# EAGLE board ads (EAGLE 6.5.0)
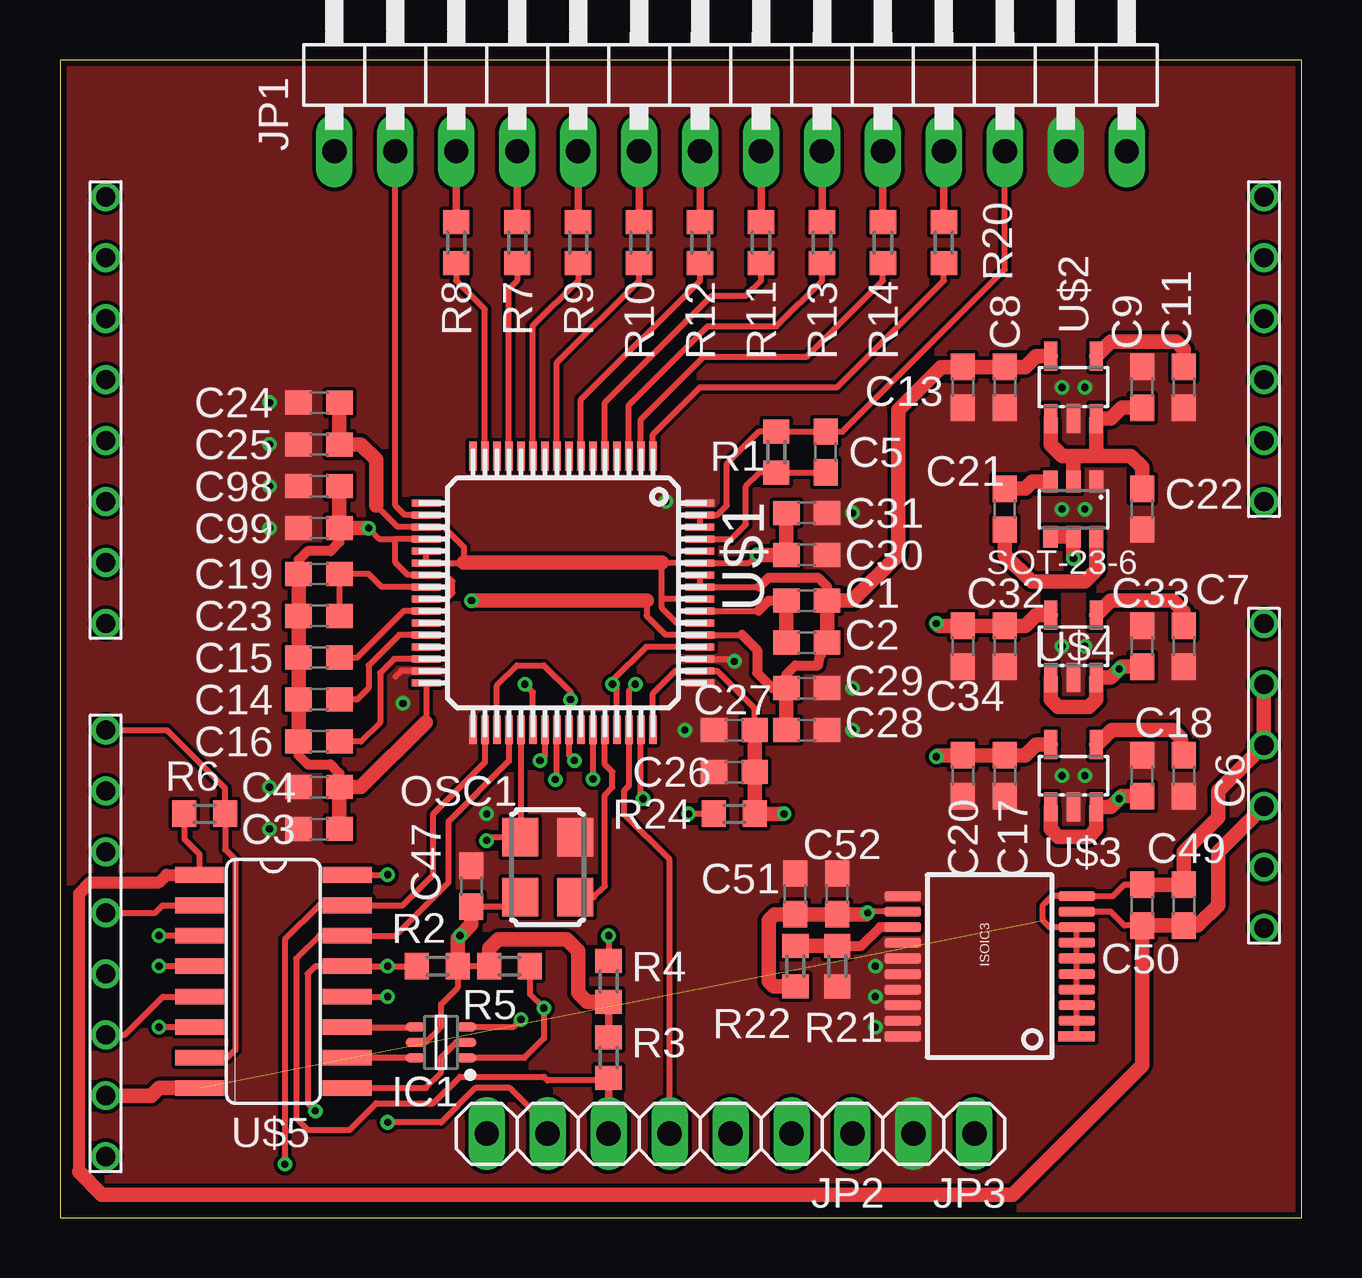
[diagram p0: board, top side]
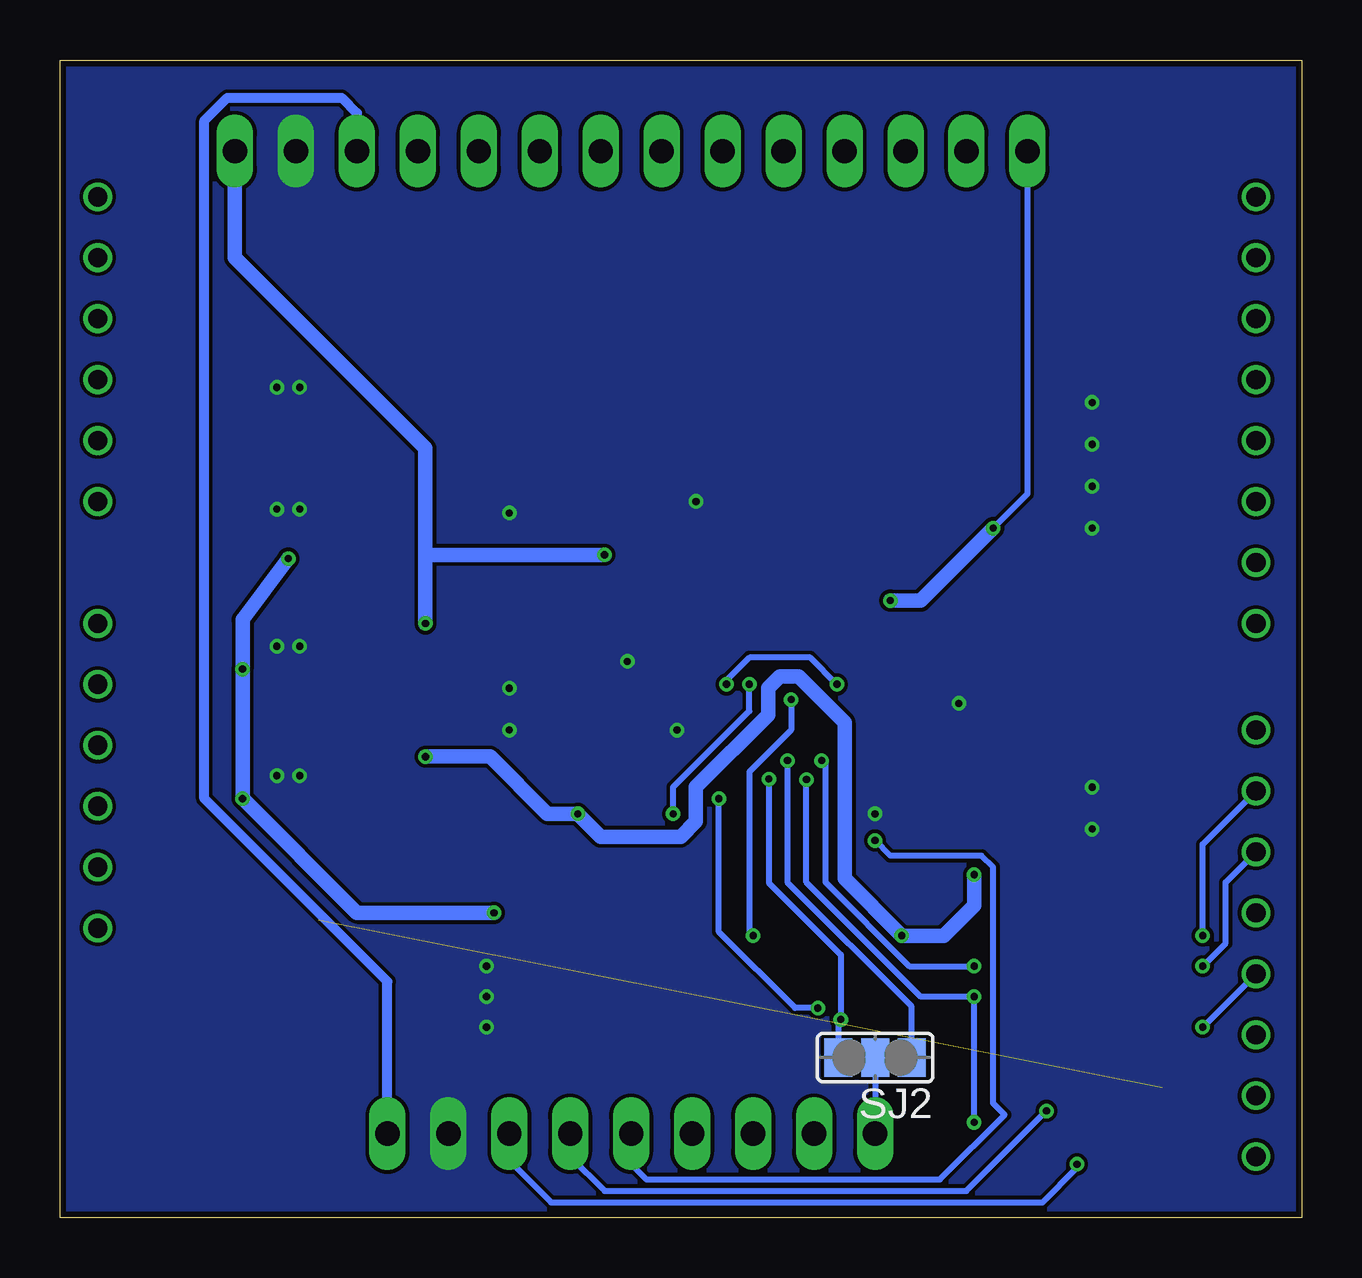
[diagram p1: board, bottom side, seen from below]

Size 51.74 x 48.25 mm. Coordinates in mm from the lower left corner, seen from the top.
Outline: 0,0 51.74,0 51.74,48.25 0,48.25 0,0
Copper layers (1*2*15*16): Top 0.035mm / dielectric 0.2mm / layer 2 0.0175mm / dielectric 1.1mm / layer 15 0.0175mm / dielectric 0.2mm / Bottom 0.035mm
Design rules "SeeedStudio_DRU_no_angle_20130527": minimum track width 6mil, minimum drill 12mil, track to track 6mil, track to pad 6mil, pad to pad 6mil, via to via 6mil, smd to smd 0mil, copper to edge 10mil, drill to drill 10mil, minimum pad ring 6mil, minimum via ring 6mil, stop-mask expansion 2mil, vias tented up to drill 25mil, thermal gap 10mil

## Footprints (pad centres in the part's own frame; a part is rotated, then mirrored left to right if it is on the bottom)
ARDUINO = drill 0.8: 3V3 25.4,-12.7; 5V 25.4,-10.16; A_0 25.4,2.54; A_1 25.4,5.08; A_2 25.4,7.62; A_3 25.4,10.16; A_4 25.4,12.7; A_5 25.4,15.24; AREF -22.86,-24.765; D_0 -22.86,15.24; D_1 -22.86,12.7; D_2 -22.86,10.16; D_3 -22.86,7.62; D_4 -22.86,5.08; D_5 -22.86,2.54; D_6 -22.86,0; D_7 -22.86,-2.54; D_8 -22.86,-6.985; D_9 -22.86,-9.525; D_10 -22.86,-12.065; D_11 -22.86,-14.605; D_12 -22.86,-17.145; D_13 -22.86,-19.685; GND0 -22.86,-22.225; GND1 25.4,-7.62; GND2 25.4,-5.08; RESET 25.4,-15.24; VIN 25.4,-2.54
C0603 = smd 1.1 x 1: 1 -0.85,0; 2 0.85,0
SOT65P210X110-6AN_SC88_SC70-6 = smd 0.85 x 0.4: 1 -1.05,0.65; 2 -1.05,0; 3 -1.05,-0.65; 4 1.05,-0.65; 5 1.05,0; 6 1.05,0.65
SSOP20 = smd 0.419 x 1.524: 1 -2.925,-3.625; 2 -2.275,-3.625; 3 -1.625,-3.625; 4 -0.975,-3.625; 5 -0.325,-3.625; 6 0.325,-3.625; 7 0.975,-3.625; 8 1.625,-3.625; 9 2.275,-3.625; 10 2.925,-3.625; 11 2.925,3.625; 12 2.275,3.625; 13 1.625,3.625; 14 0.975,3.625; 15 0.325,3.625; 16 -0.325,3.625; 17 -0.975,3.625; 18 -1.625,3.625; 19 -2.275,3.625; 20 -2.925,3.625
1X14/90 = drill 1.016 long: 1 -16.51,-3.81; 2 -13.97,-3.81; 3 -11.43,-3.81; 4 -8.89,-3.81; 5 -6.35,-3.81; 6 -3.81,-3.81; 7 -1.27,-3.81; 8 1.27,-3.81; 9 3.81,-3.81; 10 6.35,-3.81; 11 8.89,-3.81; 12 11.43,-3.81; 13 13.97,-3.81; 14 16.51,-3.81
1X07 = drill 1.016 long: 1 -7.62,0; 2 -5.08,0; 3 -2.54,0; 4 0,0; 5 2.54,0; 6 5.08,0; 7 7.62,0
1X02 = drill 1.016 long: 1 -1.27,0; 2 1.27,0
ASF = smd 1.6 x 1.5: 1 -1.25,-1.15; 2 1.25,-1.15; 3 1.25,1.15; 4 -1.25,1.15
R0603 = smd 1 x 1.1: 1 -0.85,0; 2 0.85,0
SJ_2 = smd 1.168 x 1.6: 1 -1.524,0; 2 0,0; 3 1.524,0
SOT23-6 = smd 0.6 x 0.9: 1 -0.95,-1.15; 2 0,-1.15; 3 0.95,-1.15; 4 0.95,1.15; 5 0,1.15; 6 -0.95,1.15
TQFP64-10X10 = smd 1.2 x 0.3: 1 -5.7,3.75; 2 -5.7,3.25; 3 -5.7,2.75; 4 -5.7,2.25; 5 -5.7,1.75; 6 -5.7,1.25; 7 -5.7,0.75; 8 -5.7,0.25; 9 -5.7,-0.25; 10 -5.7,-0.75; 11 -5.7,-1.25; 12 -5.7,-1.75; 13 -5.7,-2.25; 14 -5.7,-2.75; 15 -5.7,-3.25; 16 -5.7,-3.75; 33 5.7,-3.75; 34 5.7,-3.25; 35 5.7,-2.75; 36 5.7,-2.25; 37 5.7,-1.75; 38 5.7,-1.25; 39 5.7,-0.75; 40 5.7,-0.25; 41 5.7,0.25; 42 5.7,0.75; 43 5.7,1.25; 44 5.7,1.75; 45 5.7,2.25; 46 5.7,2.75; 47 5.7,3.25; 48 5.7,3.75 | smd 0.3 x 1.2: 17 -3.75,-5.7; 18 -3.25,-5.7; 19 -2.75,-5.7; 20 -2.25,-5.7; 21 -1.75,-5.7; 22 -1.25,-5.7; 23 -0.75,-5.7; 24 -0.25,-5.7; 25 0.25,-5.7; 26 0.75,-5.7; 27 1.25,-5.7; 28 1.75,-5.7; 29 2.25,-5.7; 30 2.75,-5.7; 31 3.25,-5.7; 32 3.75,-5.7; 49 3.75,5.7; 50 3.25,5.7; 51 2.75,5.7; 52 2.25,5.7; 53 1.75,5.7; 54 1.25,5.7; 55 0.75,5.7; 56 0.25,5.7; 57 -0.25,5.7; 58 -0.75,5.7; 59 -1.25,5.7; 60 -1.75,5.7; 61 -2.25,5.7; 62 -2.75,5.7; 63 -3.25,5.7; 64 -3.75,5.7
SOT23-5L = smd 0.55 x 1.2: 1 -0.95,-1.3; 2 0,-1.3; 3 0.95,-1.3; 4 0.95,1.3; 5 -0.95,1.3
SO16 = smd 0.66 x 2.032: 1 -4.445,-3.073; 2 -3.175,-3.073; 3 -1.905,-3.073; 4 -0.635,-3.073; 5 0.635,-3.073; 6 1.905,-3.073; 7 3.175,-3.073; 8 4.445,-3.073; 9 4.445,3.073; 10 3.175,3.073; 11 1.905,3.073; 12 0.635,3.073; 13 -0.635,3.073; 14 -1.905,3.073; 15 -3.175,3.073; 16 -4.445,3.073

## Placement (x,y rotation side)
ARDUINO1  ARDUINO  [ARDUINO]  24.77,27.3 0 top
C1  0,1 uF  [C0603]  31.11,25.72 180 top
C2  1 uF  [C0603]  31.11,23.97 180 top
C3  1 uF  [C0603]  10.79,16.19 180 top
C4  1 uF  [C0603]  10.79,17.94 180 top
C5  1.5 nF  [C0603]  31.91,31.91 90 top
C6  0.01 uF  [C0603]  46.83,18.41 270 top
C7  0.01 uF  [C0603]  46.83,23.81 270 top
C8  2.2 uF  [C0603]  39.37,34.61 270 top
C9  2.2 uF  [C0603]  45.09,34.61 90 top
C11  0.01 uF  [C0603]  46.83,34.61 270 top
C13  10 uF  [C0603]  37.62,34.61 270 top
C14  100 uF  [C0603]  10.79,21.59 0 top
C15  1 uF  [C0603]  10.79,23.34 0 top
C16  1 uF  [C0603]  10.79,19.84 0 top
C17  2.2 uF  [C0603]  39.37,18.41 270 top
C18  2.2 uF  [C0603]  45.09,18.41 90 top
C19  10 uF  [C0603]  10.79,26.83 180 top
C20  10 uF  [C0603]  37.62,18.41 270 top
C21  10 uF  [C0603]  39.37,29.53 90 top
C22  10 uF  [C0603]  45.09,29.53 270 top
C23  0.1 uF  [C0603]  10.79,25.08 180 top
C24  1 uF  [C0603]  10.79,33.97 180 top
C25  0.1 uF  [C0603]  10.79,32.23 180 top
C26  1 uF  [C0603]  28.1,18.57 180 top
C27  0.1 uF  [C0603]  28.1,20.32 180 top
C28  1 uF  [C0603]  31.11,20.32 180 top
C29  0.1 uF  [C0603]  31.11,22.07 180 top
C30  1 uF  [C0603]  31.11,27.62 0 top
C31  0.1 uF  [C0603]  31.11,29.37 0 top
C32  2.2 uF  [C0603]  39.37,23.81 270 top
C33  2.2 uF  [C0603]  45.09,23.81 90 top
C34  10 uF  [C0603]  37.62,23.81 270 top
C47  10 pF  [C0603]  17.14,13.81 270 top
C49  10 uF  [C0603]  46.83,13.02 90 top
C50  0.1 uF  [C0603]  45.09,13.02 90 top
C51  10 uF  [C0603]  30.64,13.49 90 top
C52  0.1 uF  [C0603]  32.38,13.49 90 top
C98  1 uF  [C0603]  10.79,30.48 0 top
C99  0.1 uF  [C0603]  10.79,28.73 0 top
IC1  NC7WZ17P6X  [SOT65P210X110-6AN_SC88_SC70-6]  15.88,7.3 180 top
ISOIC3  ADUM6010  [SSOP20]  38.73,10.48 90 top
JP1  [1X14/90]  27.94,48.26 0 top
JP2  [1X07]  25.4,3.49 180 top
JP3  [1X02]  36.83,3.49 180 top
OSC1  ASFL1  [ASF]  20.32,14.61 90 top
R1  1 M  [R0603]  29.84,31.91 270 top
R2  10 k  [R0603]  15.72,10.48 0 top
R3  10 k  [R0603]  22.86,6.67 270 top
R4  10 k  [R0603]  22.86,9.84 90 top
R5  10 k  [R0603]  18.73,10.48 180 top
R6  10 k  [R0603]  6.03,16.83 180 top
R7  5 k  [R0603]  19.05,40.64 90 top
R8  5 k  [R0603]  16.51,40.64 90 top
R9  5 k  [R0603]  21.59,40.64 90 top
R10  5 k  [R0603]  24.13,40.64 90 top
R11  5 k  [R0603]  29.21,40.64 90 top
R12  5 k  [R0603]  26.67,40.64 90 top
R13  5 k  [R0603]  31.75,40.64 90 top
R14  5 k  [R0603]  34.29,40.64 90 top
R20  5 k  [R0603]  36.83,40.64 90 top
R21  10 k  [R0603]  32.38,10.48 90 top
R22  17 k  [R0603]  30.64,10.48 270 top
R24  10 k  [R0603]  28.1,16.83 0 top
SJ2  [SJ_2]  17.78,6.67 180 bottom
SOT-23-6  LM2664  [SOT23-6]  42.23,29.53 180 top
U$1  ADS1298-TQFP64  [TQFP64-10X10]  20.95,26.04 270 top
U$2  TPS73025  [SOT23-5L]  42.23,34.61 0 top
U$3  TPS73025  [SOT23-5L]  42.23,18.41 0 top
U$4  TPS73025  [SOT23-5L]  42.23,23.81 0 top
U$5  SI8462IS1  [SO16]  8.89,9.84 270 top

## Library data of the parts
ARDUINO1 = dp_devices
C1-C9 C11 C13-C34 C47 C49-C52 C98 C99 R1-R14 R20-R22 R24 = rcl
IC1 = fairchild-tinylogic
ISOIC3 = SparkysWidgets
JP1-JP3 = pinhead
OSC1 = crystal; MF: Abracon Corporation; MPN: ASFL1-125.000MHZ-EC-T; OC_FARNELL: 1838931; OC_NEWARK: 19M1882
SJ2 = jumper
SOT-23-6 = lm2664
U$1 = ads1298
U$2-U$4 = texas-instruments
U$5 = silicon-labs

## Nets
1N: JP1.3 R8.2
2N: JP1.4 R7.2
3N: JP1.5 R9.2
4N: JP1.6 R10.2
5N: JP1.7 R12.2
6N: JP1.8 R11.2
7N: JP1.9 R13.2
8N: JP1.11 R20.2
8P: JP1.10 R14.2
-RAW: C9.1 C22.1 SOT-23-6.2 U$2.1 U$2.3
_CS: ARDUINO1.D_10 U$5.4
_DRDY: ARDUINO1.D_8 R6.1 U$5.7
_GND: ARDUINO1.GND0 ARDUINO1.GND1 ARDUINO1.GND2 C49.2 C50.2 ISOIC3.1 ISOIC3.2 ISOIC3.3 ISOIC3.4 ISOIC3.5 ISOIC3.6 ISOIC3.7 ISOIC3.8 ISOIC3.10 U$5.8
_MISO: ARDUINO1.D_12 U$5.6
_MOSI: ARDUINO1.D_11 U$5.2
_RESET: ARDUINO1.D_9 U$5.3
_SCLK: ARDUINO1.D_13 U$5.5
_VDD: ARDUINO1.5V C49.1 C50.1 ISOIC3.9 R6.2 U$5.1
AGND: C3.2 C4.2 C6.2 C7.2 C8.2 C9.2 C11.2 C13.2 C17.2 C18.2 C20.2 C22.2 C24.2 C25.2 C26.2 C27.2 C28.1 C29.1 C30.2 C31.2 C32.2 C33.2 C34.2 C47.1 C51.2 C52.2 C98.1 C99.1 ISOIC3.11 ISOIC3.14 ISOIC3.15 ISOIC3.16 ISOIC3.17 ISOIC3.18 ISOIC3.19 ISOIC3.20 JP1.13 JP3.2 OSC1.2 R21.1 SOT-23-6.1 U$1.31 U$1.33 U$1.49 U$1.51 U$1.64 U$2.2 U$3.2 U$4.2
AVDD: C24.1 C25.1 C30.1 C31.1 C32.1 C34.1 JP1.14 U$1.19 U$1.21 U$1.22 U$1.54 U$1.56 U$1.59 U$4.5
AVSS: C1.1 C2.1 C3.1 C4.1 C8.1 C13.1 C14.1 C15.1 C16.1 C19.2 C23.2 C28.2 C29.2 C98.2 C99.2 JP1.1 U$1.20 U$1.23 U$1.25 U$1.32 U$1.53 U$1.57 U$1.58 U$2.5
BIAS_ELEC: C5.2 JP1.12 JP3.1 R1.1 U$1.62 U$1.63
CLK: JP2.3 OSC1.3 U$1.37
CS: JP2.2 R2.1 U$1.39 U$5.13
D_IN: JP2.1 U$1.34 U$5.15
D_OUT: IC1.3 SJ2.3 U$1.43
DAISY_IN: SJ2.1 U$1.41
DRDY: IC1.1 R5.1 U$1.47
DVDD: C17.1 C20.1 C26.1 C27.1 C47.2 IC1.5 OSC1.4 R2.2 R3.1 R4.1 R5.2 R24.2 U$1.48 U$1.50 U$3.5 U$5.16
GND2: IC1.2 U$5.9
GPIO_2: OSC1.1 U$1.44
GPIO_3: R24.1 U$1.45 U$1.52
IN1P: R8.1 U$1.15
IN2P: R7.1 U$1.13
IN3P: R9.1 U$1.11
IN4P: R10.1 U$1.9
IN5P: R12.1 U$1.7
N$1: JP2.7 SJ2.2
N$2: C11.1 U$2.4
N$3: C21.1 SOT-23-6.6
N$4: C14.2 U$1.28
N$5: C16.2 U$1.30
N$6: C1.2 C2.2 U$1.55
N$7: C21.2 SOT-23-6.3
N$8: IC1.4 U$5.11
N$9: C19.1 C23.1 U$1.24
N$10: IC1.6 U$5.10
N$11: C5.1 R1.2 U$1.61
N$12: C15.2 U$1.26
N$13: C6.1 U$3.4
N$14: ISOIC3.13 R21.2 R22.1
N$15: C7.1 U$4.4
N$16: R11.1 U$1.5
N$17: R13.1 U$1.3
N$19: R20.1 U$1.1
N$20: R14.1 U$1.2
PWDN: R4.2 U$1.35
RAW: C18.1 C33.1 C51.1 C52.1 ISOIC3.12 R22.2 SOT-23-6.4 SOT-23-6.5 U$3.1 U$3.3 U$4.1 U$4.3
RESET: JP2.5 R3.2 U$1.36 U$5.14
SCLK: JP2.6 U$1.40 U$5.12
SRB2: JP1.2 U$1.18
START: JP2.4 U$1.38 U$1.46
VIN: ARDUINO1.VIN

## Tracks (layer width: path | path; a pad name or v marks a point on that pad's centre or on a via)
1N
  Top 0.305: JP1.3 R8.2
2N
  Top 0.305: R7.2 JP1.4
3N
  Top 0.305: R9.2 JP1.5
4N
  Top 0.305: R10.2 JP1.6
5N
  Top 0.305: R12.2 JP1.7
6N
  Top 0.305: R11.2 JP1.8
7N
  Top 0.305: R13.2 JP1.9
8N
  Top 0.305: R20.2 JP1.11
8P
  Top 0.305: R14.2 JP1.10
-RAW
  Top 0.61: 43.18,31.75 44.61,31.75 45.09,31.27 C22.1 | 43.18,31.75 U$2.3 43.78,33.31 44.23,33.76 C9.1 | U$2.1 41.28,32.22 41.75,31.75 42.23,31.75 | 42.23,31.75 43.18,31.75 | SOT-23-6.2 42.23,31.75
_CS  (via drill 0.3)
  Top 0.254: U$5.4 v4.13,10.48
  Bottom 0.254: v4.13,10.48 3.17,11.43 3.17,13.97 ARDUINO1.D_10
_DRDY
  Top 0.254: U$5.7 6.99,6.67 7.3,6.99 7.3,14.92 6.88,15.34 R6.1 6.88,17.88 4.45,20.32 ARDUINO1.D_8
_GND  (1 unrouted)
  Top 0.254: C50.2 44.35,13.87 43.88,13.4 ISOIC3.10 41.34,13.4 40.96,13.02 40.96,12.38 41.24,12.1 ISOIC3.8 ISOIC3.7 ISOIC3.6 ISOIC3.5 ISOIC3.4 ISOIC3.3 ISOIC3.2 ISOIC3.1
  Top 0.61: C50.2 C49.2 46.83,15.24 48.26,16.67 48.26,17.78 ARDUINO1.GND1 ARDUINO1.GND2 | U$5.8 4.13,5.4 3.81,5.08 ARDUINO1.GND0
_MISO  (via drill 0.3)
  Top 0.254: U$5.6 v4.13,7.94
  Bottom 0.254: ARDUINO1.D_12 v4.13,7.94
_MOSI
  Top 0.254: ARDUINO1.D_11 3.97,12.7 4.29,13.02 U$5.2
_RESET  (via drill 0.3)
  Top 0.254: U$5.3 v4.13,11.75
  Bottom 0.254: v4.13,11.75 4.13,15.56 ARDUINO1.D_9
_SCLK
  Top 0.254: ARDUINO1.D_13 2.7,7.62 4.29,9.21 U$5.5
_VDD
  Top 0.254: U$5.1 5.82,15.14 5.18,15.77 R6.2 | ISOIC3.9 43.76,12.75 44.35,12.17 C50.1
  Top 0.508: 0.79,1.91 0.79,13.49 1.27,13.97 4.13,13.97 4.45,14.29 U$5.1
  Top 0.61: ARDUINO1.5V 48.26,15.24 48.26,13.02 47.41,12.17 C49.1 C50.1 45.09,6.35 39.69,0.95 1.75,0.95 0.79,1.91
AGND  (via drill 0.3)
  Top 0.254: 15.08,22.79 U$1.31 14.21,22.79 13.97,22.54 | U$1.51 27.99,23.29 v28.1,23.18
  other vias: 33.02,22.07 33.02,20.32 42.7,23.81 41.75,23.81 41.75,29.53 42.7,29.53 42.7,34.61 41.75,34.61 42.7,18.41 41.75,18.41 14.29,21.43 8.73,17.94 8.73,16.19 8.73,28.73 8.73,30.48 8.73,32.23 8.73,33.97 25.24,29.84 26.04,20.32 17.78,16.83 33.02,29.37 33.97,10.48 33.97,9.21 33.97,7.94
  pour Top (no thermals): 0,0 52.07,0 52.07,48.26 0,48.26
  pour Bottom (no thermals): 0,0 51.75,0 51.75,48.26 0,48.26
AVDD  (via drill 0.3)
  Top 0.254: U$1.21 U$1.22 16.81,27.29 16.83,27.3 16.83,27.94 15.98,28.79 U$1.19 14.08,28.79 13.18,29.69 | U$1.54 25.7,24.79 25.08,25.4 25.08,25.72 | 25.08,25.72 25.08,27.3 25.1,27.29 U$1.59 28.71,27.29 v29.05,27.62 | U$1.56 25.15,25.79 25.08,25.72
  Top 0.61: 25.08,27.3 16.83,27.3 | C24.1 C25.1 12.54,32.23 13.18,31.59 13.18,29.69 | C31.1 C30.1 v29.05,27.62 | U$4.5 40.67,25.11 40.22,24.66 C32.1 C34.1 36.62,24.66 v36.51,24.77
  Bottom 0.61: JP1.14 44.45,40.01 36.51,32.07 36.51,27.62 | 36.51,27.62 v36.51,24.77 | v29.05,27.62 36.51,27.62
AVSS  (via drill 0.3)
  Top 0.254: U$1.20 13.97,28.29 | 24.45,25.72 24.45,25.08 25.25,24.29 U$1.53 28.42,24.29 | 13.97,28.29 13.97,27.3 14.49,26.79 U$1.23 16.08,26.79 16.35,26.51 16.35,26.04 16.1,25.79 U$1.25 | U$1.58 U$1.57 29.14,26.29 | U$1.32 15.26,20.65 15.24,20.64 | v12.86,28.73 13.31,28.29 13.97,28.29
  Top 0.406: C99.2 11.64,28.16 11.27,27.78 10.32,27.78 9.95,27.41 C19.2 | 28.42,24.29 29.05,23.65 29.05,22.7 29.69,22.07 C29.2 30.27,22.64 30.64,23.02 31.59,23.02 31.65,23.39 C2.1 | 29.14,26.29 29.53,26.67 31.59,26.67 31.96,26.3 C1.1 | C16.1 9.95,19.27 10.32,18.89 11.27,18.89 11.64,18.52 C4.1
  Top 0.61: v12.86,28.73 C99.2 C98.2 | C16.1 C14.1 C15.1 C23.2 C19.2 | 24.45,25.72 v17.14,25.72 | C29.2 C28.2 | C2.1 C1.1 33.02,25.72 34.92,27.62 34.92,33.66 36.73,35.46 C13.1 C8.1 40.22,35.46 40.67,35.91 U$2.5 | C3.1 C4.1 12.54,17.94 15.24,20.64
  Bottom 0.254: JP1.1 11.43,30.16 v12.86,28.73
  Bottom 0.61: v17.14,25.72 15.88,25.72 v12.86,28.73
BIAS_ELEC
  Top 0.254: U$1.62 U$1.63 27.38,29.29 27.78,29.69 27.78,31.43 29.11,32.76 R1.1 C5.2 32.6,32.76 39.37,39.53 JP1.12
  Bottom 0.406: JP3.1 38.1,9.84 45.72,17.46 45.72,45.72 44.77,46.67 40.01,46.67 39.37,46.04 JP1.12
CLK  (via drill 0.3)
  Top 0.254: U$1.37 19.2,15.89 OSC1.3 17.92,15.86 v17.78,15.72
  Bottom 0.254: JP2.3 27.94,2.22 27.3,1.59 15.08,1.59 12.38,4.29 12.86,4.76 12.86,14.61 13.34,15.08 17.14,15.08 v17.78,15.72
CS  (via drill 0.3)
  Top 0.254: R2.1 v13.65,10.48 U$5.13 10.64,10.48 10.32,10.16 10.32,4.76 v10.64,4.45 | U$1.39 20.2,19.25 v20,19.05
  Bottom 0.254: v13.65,10.48 16.35,10.48 19.84,13.97 19.84,18.89 v20,19.05 | JP2.2 30.48,2.54 29.05,1.11 13.97,1.11 v10.64,4.45
D_IN  (via drill 0.3)
  Top 0.254: U$1.34 17.7,18.98 15.56,16.83 15.56,14.29 14.29,13.02 U$5.15 10.79,13.02 9.37,11.59 v9.37,2.22
  Bottom 0.254: JP2.1 33.02,2.38 31.27,0.64 10.79,0.64 9.37,2.06 v9.37,2.22
D_OUT  (via drill 0.3)
  Top 0.254: U$1.43 v22.2,18.28 22.23,18.26 | IC1.3 18.91,7.95 v19.21,8.26
  Bottom 0.254: v22.2,18.28 22.2,13.95 19.21,10.95 v19.21,8.26 19.3,8.16 SJ2.3
DAISY_IN  (via drill 0.3)
  Top 0.254: U$1.41 21.2,19.28 v21.43,19.05
  Bottom 0.254: v21.43,19.05 21.43,13.97 16.26,8.79 SJ2.1
DRDY  (via drill 0.3)
  Top 0.254: R5.1 19.58,9.31 v20.16,8.73 20.16,7.46 19.35,6.65 IC1.1 | v24.29,17.46 24.2,17.54 U$1.47
  Bottom 0.254: v20.16,8.73 21.11,8.73 24.29,11.91 v24.29,17.46
DVDD  (via drill 0.3)
  Top 0.254: U$1.48 24.7,21.85 25.64,22.79 U$1.50 27.38,22.79 28.95,21.22 C27.1 | C47.2 18.78,12.96 OSC1.4 | IC1.5 15.24,7.3 15.88,7.94 15.88,8.89 16.57,9.58 R2.2 R5.2 | U$5.16 v13.65,14.29
  Top 0.305: R3.1 R4.1
  Top 0.61: U$3.5 40.67,19.71 40.22,19.27 C17.1 C20.1 36.57,19.27 v36.51,19.21 | R2.2 16.57,11.64 v16.67,11.75 17.14,12.22 C47.2 | v30.16,16.83 R24.2 C26.1 C27.1 | R4.1 21.96,8.99 21.59,9.37 21.59,11.11 21.11,11.59 18.26,11.59 17.88,11.21 R5.2
  Bottom 0.61: v36.51,19.21 33.81,19.21 31.43,16.83 v30.16,16.83 29.21,15.88 25.88,15.88 25.24,16.51 25.24,17.94 22.23,20.95 22.23,22.07 21.75,22.54 20.95,22.54 19.05,20.64 19.05,14.13 v16.67,11.75 14.92,11.75 13.65,13.02 v13.65,14.29
GND2
  Top 0.254: U$5.9 15.24,5.4 15.88,6.03 15.88,6.67 16.51,7.3 IC1.2
GPIO_2
  Top 0.254: OSC1.1 22.25,13.36 22.7,13.81 22.7,17.62 23.02,17.94 23.02,18.57 22.7,18.89 U$1.44
GPIO_3  (via drill 0.3)
  Top 0.254: U$1.52 24.42,23.79 23.02,22.38 v23.02,22.23 23.2,22.04 U$1.45 | R24.1 v26.19,16.83
  Bottom 0.254: v23.02,22.23 23.02,21.11 26.19,17.94 v26.19,16.83
IN1P
  Top 0.254: R8.1 16.51,39.05 17.7,37.86 U$1.15
IN2P
  Top 0.254: R7.1 19.05,39.05 18.7,38.71 U$1.13
IN3P
  Top 0.254: R9.1 21.59,39.05 19.68,37.15 19.68,31.75 U$1.11
IN4P
  Top 0.254: U$1.9 20.7,35.63 24.13,39.05 R10.1
IN5P
  Top 0.254: U$1.7 21.7,34.09 26.67,39.05 R12.1
  Top 0.305: 26.47,39.59 R12.1
N$1
  Bottom 0.254: SJ2.2 JP2.7
N$2
  Top 0.61: C11.1 46.83,36.2 46.51,36.51 43.78,36.51 U$2.4
N$3
  Top 0.61: C21.1 39.37,27.62 40.48,26.51 42.7,26.51 43.18,26.99 SOT-23-6.6
N$4
  Top 0.254: U$1.28 14.12,24.29 12.86,23.02 12.86,22.07 12.38,21.59 C14.2
N$5
  Top 0.254: U$1.30 13.92,23.29 13.34,22.7 13.34,20.64 12.54,19.84 C16.2
N$6
  Top 0.254: U$1.55 29.09,25.29
  Top 0.406: 29.09,25.29 29.53,25.72 C1.2
  Top 0.61: C1.2 C2.2
N$7
  Top 0.61: C21.2 40.22,30.38 40.52,30.68 SOT-23-6.3
N$8
  Top 0.254: U$5.11 14.81,7.94 IC1.4
N$9
  Top 0.254: U$1.24 13.4,26.29 12.86,26.83 C19.1 C23.1
N$10
  Top 0.254: U$5.10 14.81,6.67 IC1.6
N$11
  Top 0.254: U$1.61 27.97,28.29 28.57,28.89 28.57,30.48 29.15,31.06 R1.2 C5.1
N$12
  Top 0.254: C15.2 12.38,23.34 14.33,25.29 U$1.26
N$13
  Top 0.61: U$3.4 43.21,19.71 43.81,20.32 46.35,20.32 46.67,20 C6.1
N$14
  Top 0.406: ISOIC3.13 34.17,12.1 33.39,11.33 R21.2
  Top 0.61: R22.1 R21.2
N$15
  Top 0.61: U$4.4 43.78,25.72 46.35,25.72 46.83,25.24 C7.1
N$16
  Top 0.254: U$1.5 22.7,33.98 27.15,38.42 28.57,38.42 29.21,39.05 R11.1
N$17
  Top 0.254: U$1.3 23.7,33.87 26.99,37.15 29.84,37.15 31.75,39.05 R13.1
N$19
  Top 0.254: R20.1 36.83,39.05 32.38,34.61 26.67,34.61 24.7,32.64 U$1.1
N$20
  Top 0.254: U$1.2 24.2,33.25 26.83,35.88 31.11,35.88 34.29,39.05 R14.1
PWDN  (via drill 0.3)
  Top 0.254: U$1.35 18.2,22.17 19.05,23.02 20.16,23.02 21.27,21.91 v21.27,21.59 | v22.86,11.75 R4.2
  Bottom 0.254: v21.27,21.59 21.27,20.32 23.02,18.57 23.02,11.91 v22.86,11.75
RAW  (via drill 0.3)
  Top 0.254: ISOIC3.12 33.71,12.75 v33.66,12.7
  Top 0.61: C18.1 44.23,17.57 v44.13,17.46 43.78,17.11 U$3.3 43.18,16.19 42.86,15.88 41.59,15.88 41.28,16.19 U$3.1 | C33.1 44.23,22.96 v44.13,22.86 43.78,22.51 U$4.3 43.18,21.59 42.86,21.27 41.59,21.27 41.28,21.59 U$4.1 | SOT-23-6.4 SOT-23-6.5 v42.23,27.46 | v33.66,12.7 33.6,12.64 C52.1 C51.1 29.79,12.64 29.53,12.38 29.53,9.84 29.74,9.63 R22.2
  Bottom 0.61: v42.23,27.46 44.13,24.92 v44.13,22.86 v44.13,17.46 39.37,12.7 v33.66,12.7
RESET
  Top 0.254: U$1.36 18.7,19.02 16.19,16.51 16.19,13.97 13.97,11.75 U$5.14 10.79,11.75 9.84,10.79 9.84,4.13 10.32,3.65 12.06,3.65 13.18,4.76 15.56,4.76 16.67,5.87 20.16,5.87 20.32,5.71 22.76,5.71
  Top 0.305: JP2.5 R3.2 22.76,5.71
SCLK  (via drill 0.3)
  Top 0.254: U$5.12 v13.65,9.21 | v20.64,18.26 20.7,18.32 U$1.40 | JP2.6 20.32,3.81 18.73,5.4 17.3,5.4 15.88,3.97 v13.65,3.97
  Bottom 0.254: v20.64,18.26 20.64,13.97 15.88,9.21 v13.65,9.21 v13.65,3.97
SRB2
  Top 0.254: U$1.18 14.37,29.29 13.97,29.69 JP1.2
START  (via drill 0.3)
  Top 0.254: v23.97,22.23 23.7,21.96 U$1.46 23.7,17.99 23.5,17.78 23.5,16.83 25.4,14.92 JP2.4 | U$1.38 19.7,21.89 v19.37,22.23
  Bottom 0.254: v19.37,22.23 20.48,23.34 23.02,23.34 23.97,22.38 v23.97,22.23